# EAGLE board timer (EAGLE 6.5.0)
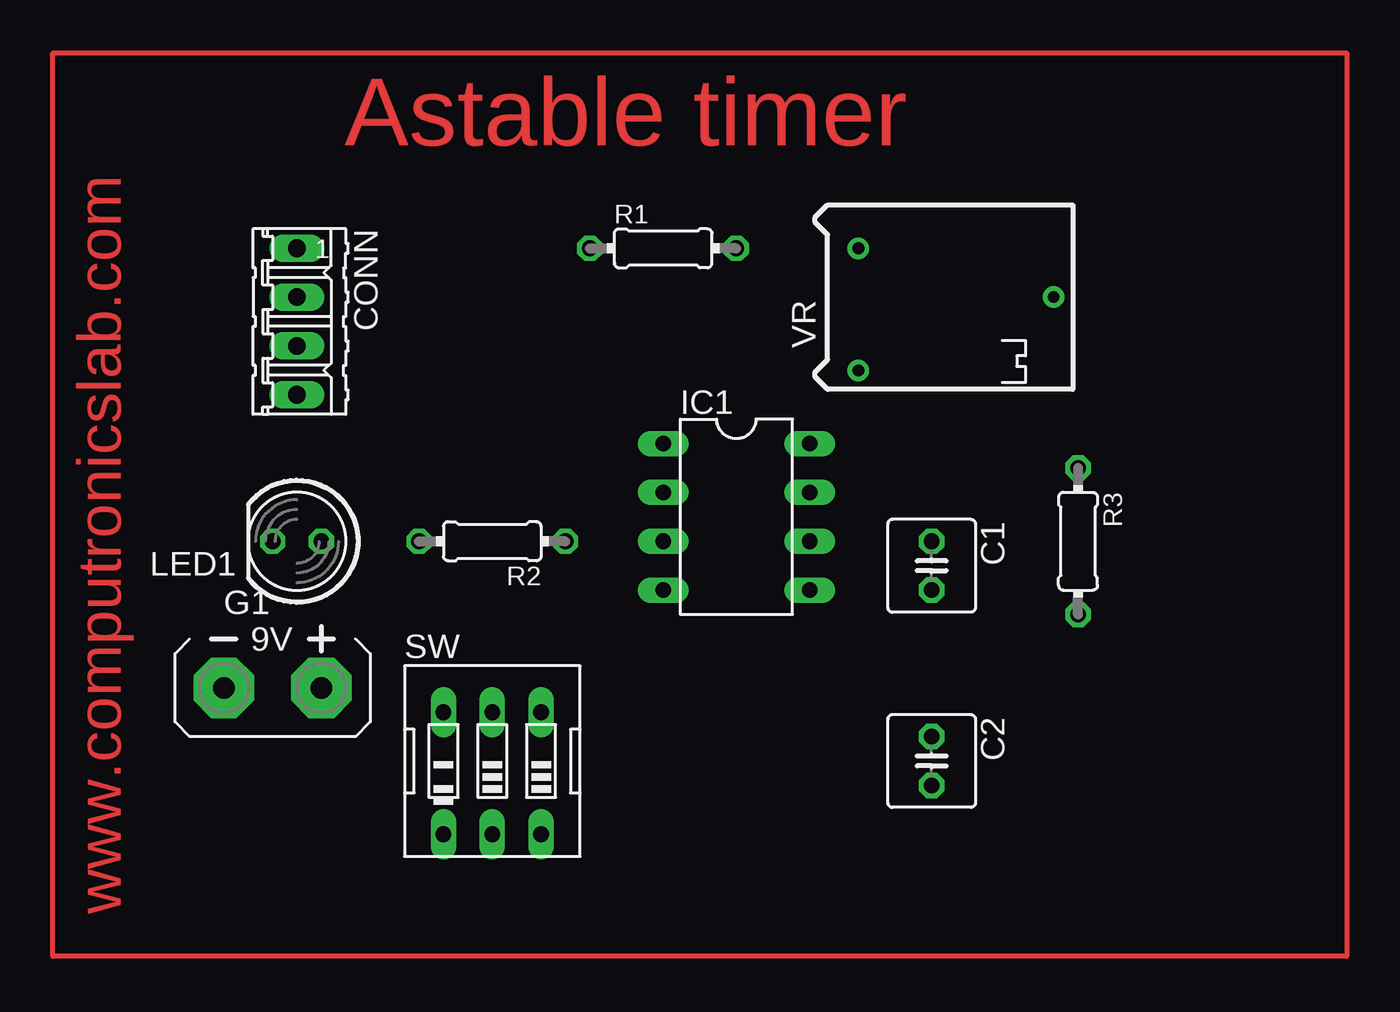
[diagram p0: board, top side]
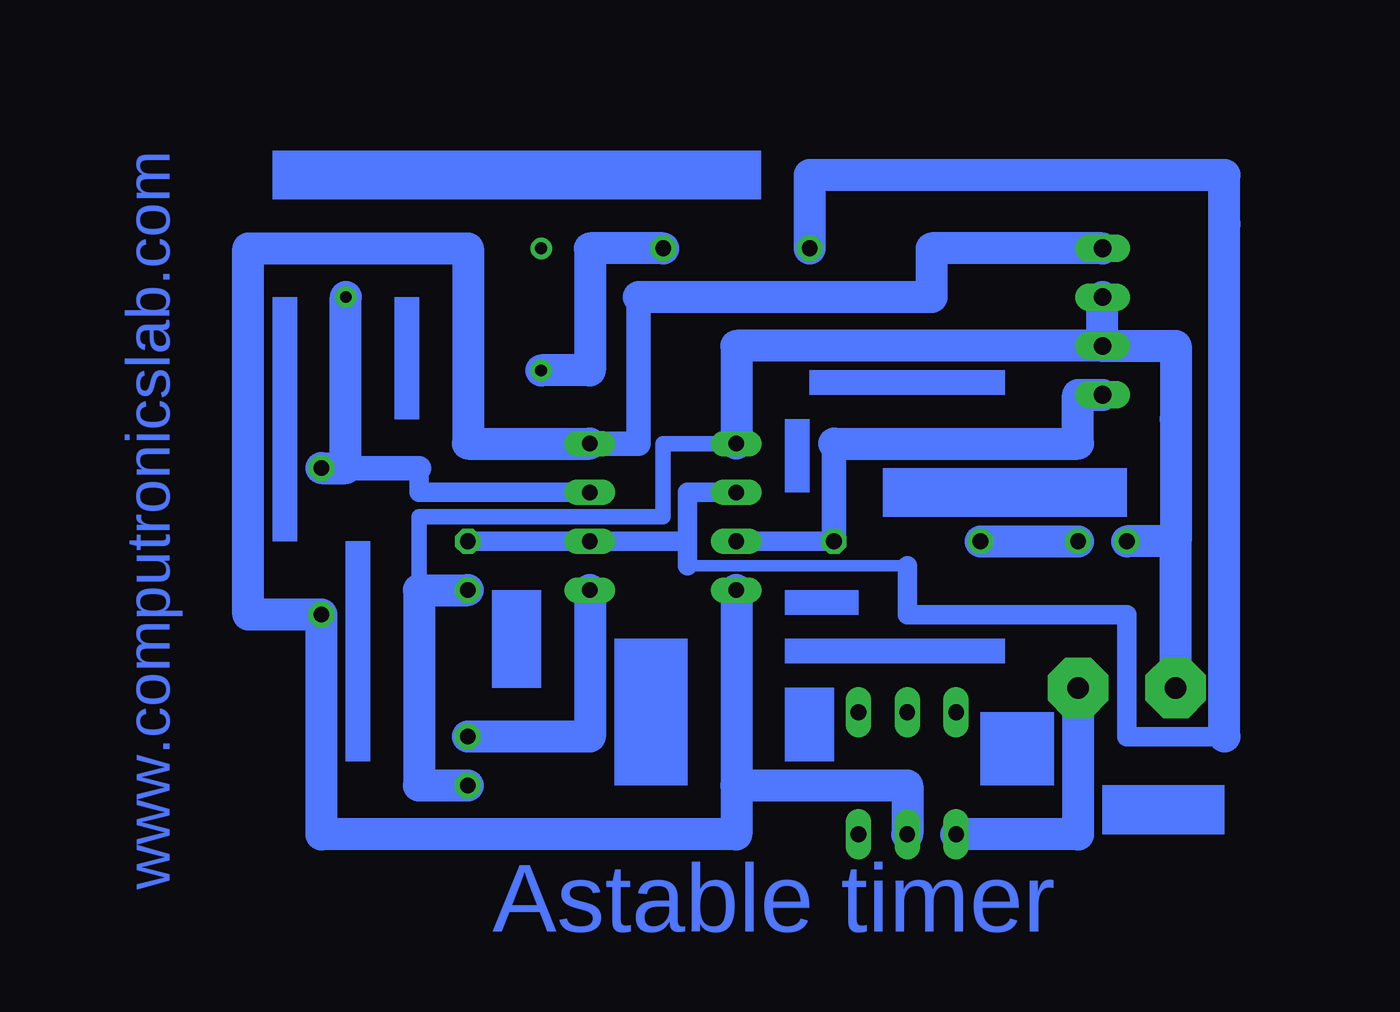
[diagram p1: board, bottom side, seen from below]

No outline drawn. Coordinates in mm, seen from the top.
Copper layers (1*16): Top 0.035mm / dielectric 1.5mm / Bottom 0.035mm
Design rules "default": minimum track width 10mil, minimum drill 24mil, track to track 8mil, track to pad 8mil, pad to pad 8mil, via to via 8mil, smd to smd 8mil, copper to edge 40mil, drill to drill 8mil, minimum pad ring 10mil, minimum via ring 8mil, stop-mask expansion 4mil, vias tented up to drill 0mil, thermal gap 10mil

## Footprints (pad centres in the part's own frame; a part is rotated, then mirrored left to right if it is on the bottom)
C025-050X050 = drill 0.813 octagon: 1 -1.27,0; 2 1.27,0
04P = drill 0.914 long: 1 -3.81,0; 2 -1.27,0; 3 1.27,0; 4 3.81,0
AB9V = drill 1.118 pad 3.15 octagon: + 0,2.54; - 0,-2.54
DIL-08 = drill 0.813 long: 1 -3.81,-3.81; 2 -1.27,-3.81; 3 1.27,-3.81; 4 3.81,-3.81; 5 3.81,3.81; 6 1.27,3.81; 7 -1.27,3.81; 8 -3.81,3.81
LED5MM = drill 0.813 octagon: A -1.27,0; K 1.27,0
0204/7 = drill 0.813 octagon: 1 -3.81,0; 2 3.81,0
EDG-03 = drill 0.813 long: 1 -2.54,-3.81; 2 0,-3.81; 3 2.54,-3.81; 4 2.54,2.54; 5 0,2.54; 6 -2.54,2.54
RTRIM64P = drill 0.61: 1 -2.54,-3.81; 2 7.62,0; 3 -2.54,2.54

## Placement (x,y rotation side)
C1  100uf  [C025-050X050]  45.72,39.37 270 top
C2  0.1uf  [C025-050X050]  45.72,29.21 270 top
CONN  4 PIN  [04P]  12.7,52.07 270 top
G1  AB9V  [AB9V]  11.43,33.02 270 top
IC1  NE555  [DIL-08]  35.56,41.91 270 top
LED1  5mm  [LED5MM]  12.7,40.64 180 top
R1  1K  [0204/7]  31.75,55.88 0 top
R2  220E  [0204/7]  22.86,40.64 180 top
R3  4.7K  [0204/7]  53.34,40.64 270 top
SW  on/of button  [EDG-03]  22.86,29.21 0 top
VR  100k  [RTRIM64P]  44.45,53.34 0 top

## Library data of the parts
C1 C2 R1-R3 = rcl
CONN = con-amp-quick; OC_FARNELL: unknown; OC_NEWARK: unknown
G1 = battery
IC1 = st-microelectronics; MF: Arrow Electronics; MPN: NE555N; OC_FARNELL: 1467742; OC_NEWARK: 89K1486
LED1 = led
SW = special
VR = resistor

## Nets
N$1: C1.1 IC1.2 IC1.6 R1.1
N$2: C2.1 IC1.5
N$3: IC1.7 R3.1 VR.2
N$4: CONN.4 IC1.3 R2.1
N$5: LED1.A R2.2
N$6: G1.+ SW.1
N$7: R1.2 VR.1
N$9: C1.2 C2.2 CONN.2 CONN.3 G1.- IC1.1 LED1.K
N$11: CONN.1 IC1.4 IC1.8 R3.2 SW.2

## Tracks (layer width: path | path; a pad name or v marks a point on that pad's centre or on a via)
N$1
  Bottom 0.61: 34.29,39.37 22.86,39.37
  Bottom 1.016: C1.1 IC1.6 34.29,40.64 | 34.29,40.64 34.29,43.18 IC1.2 | 6.35,30.48 11.43,30.48 11.43,36.83 22.86,36.83 22.86,39.37 | 34.29,40.64 34.29,39.37
  Bottom 1.676: R1.1 27.94,57.15 27.94,59.69 6.35,59.69 6.35,57.15 6.35,30.48
N$2
  Bottom 1.676: IC1.5 39.37,30.48 C2.1
N$3
  Bottom 1.016: 48.26,44.45 48.26,43.18 IC1.7
  Bottom 1.27: 52.07,44.45 48.26,44.45
  Bottom 1.676: VR.2 52.07,44.45 R3.1
N$4
  Bottom 0.254: 26.67,41.91 R2.1
  Bottom 1.016: IC1.3 R2.1
  Bottom 1.27: R2.1 26.67,45.72
  Bottom 1.676: 26.67,45.72 13.97,45.72 13.97,48.26 CONN.4
N$5
  Bottom 1.676: R2.2 LED1.A
N$6
  Bottom 1.676: SW.1 13.97,25.4 13.97,31.75 G1.+
N$7
  Bottom 1.676: R1.2 39.37,55.88 39.37,49.53 VR.1
N$8
  Top 0.254: 0,66.04 67.31,66.04 67.31,19.05 0,19.05 0,66.04
N$9
  Bottom 0.254: 46.99,27.94 C2.2
  Bottom 0.813: 48.26,38.1 48.26,41.91 35.56,41.91 35.56,45.72 IC1.1
  Bottom 1.676: G1.- 8.89,40.64 | C2.2 48.26,27.94 48.26,38.1 C1.2 | IC1.1 31.75,50.8 CONN.3 | CONN.3 CONN.2 | 8.89,40.64 8.89,46.99 8.89,50.8 CONN.3 | 8.89,40.64 LED1.K
N$11
  Bottom 1.27: 36.83,53.34 36.83,45.72 IC1.8
  Bottom 1.676: 36.83,53.34 21.59,53.34 21.59,55.88 CONN.1 | IC1.4 31.75,27.94 | 31.75,27.94 31.75,25.4 53.34,25.4 R3.2 57.15,36.83 57.15,55.88 45.72,55.88 45.72,45.72 IC1.8 | SW.2 22.86,27.94 31.75,27.94
(copper drawn outside any net)
  shapes: Bottom area x14

## Text on the board
Top: Astable timer | www.computronicslab.com
Bottom: www.computronicslab.com | Astable timer